# Altium PCB RNG_pcb.PcbDoc
Units mil, origin at the board's own origin, x right, y up, seen from the top; angles counter-clockwise.
Board outline 1400 x 2500 mil, 4 copper layers (Top Layer, Layer 1, Layer 2, Bottom Layer), stack 21.665 mil thick; 53 components, 35 nets, 171 pads, 39 vias.
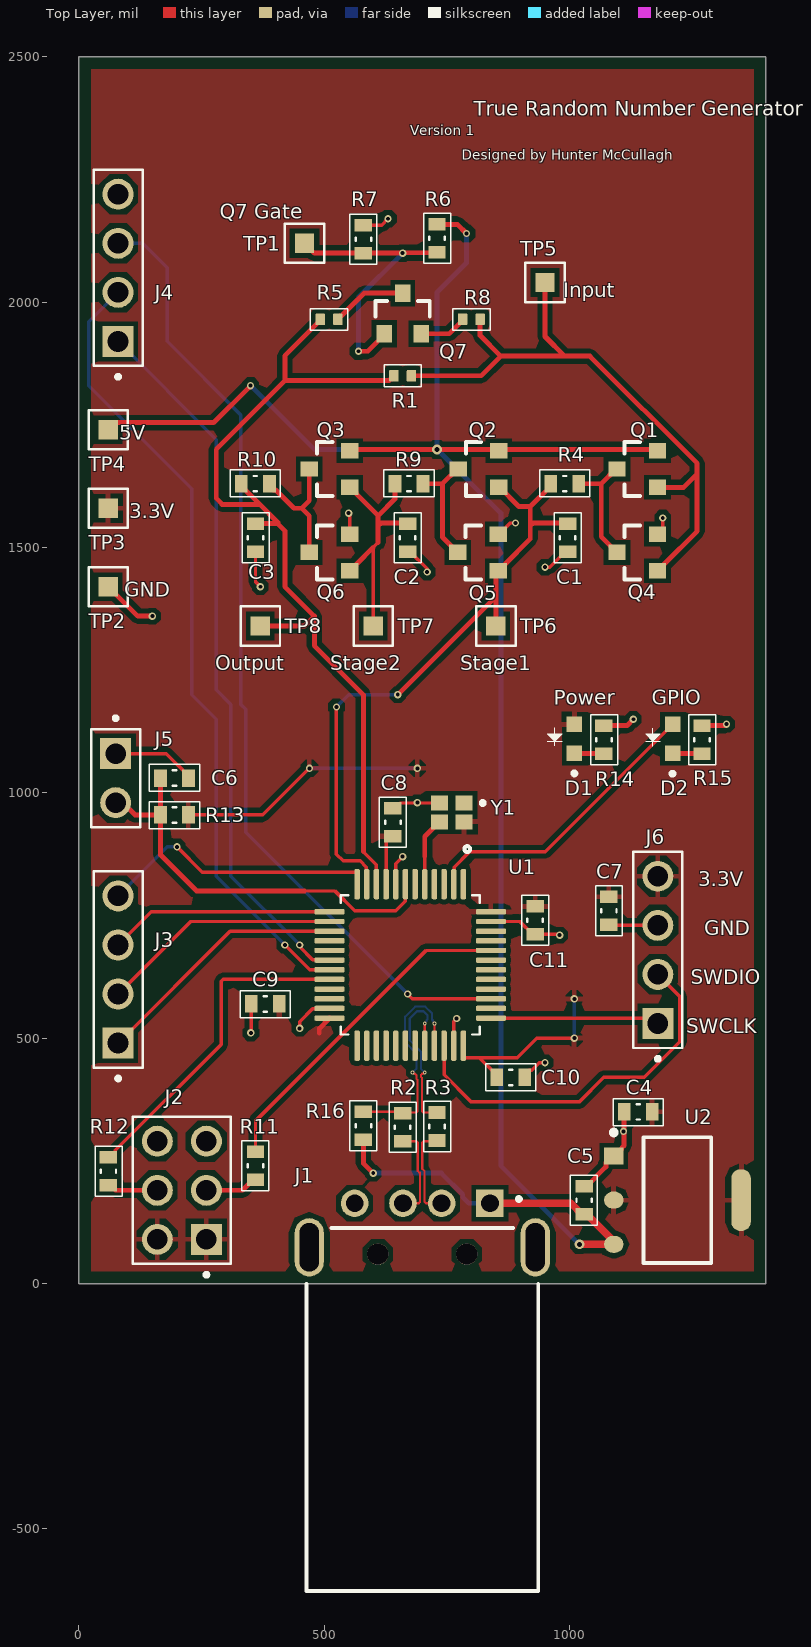
[diagram p0: Top Layer view]
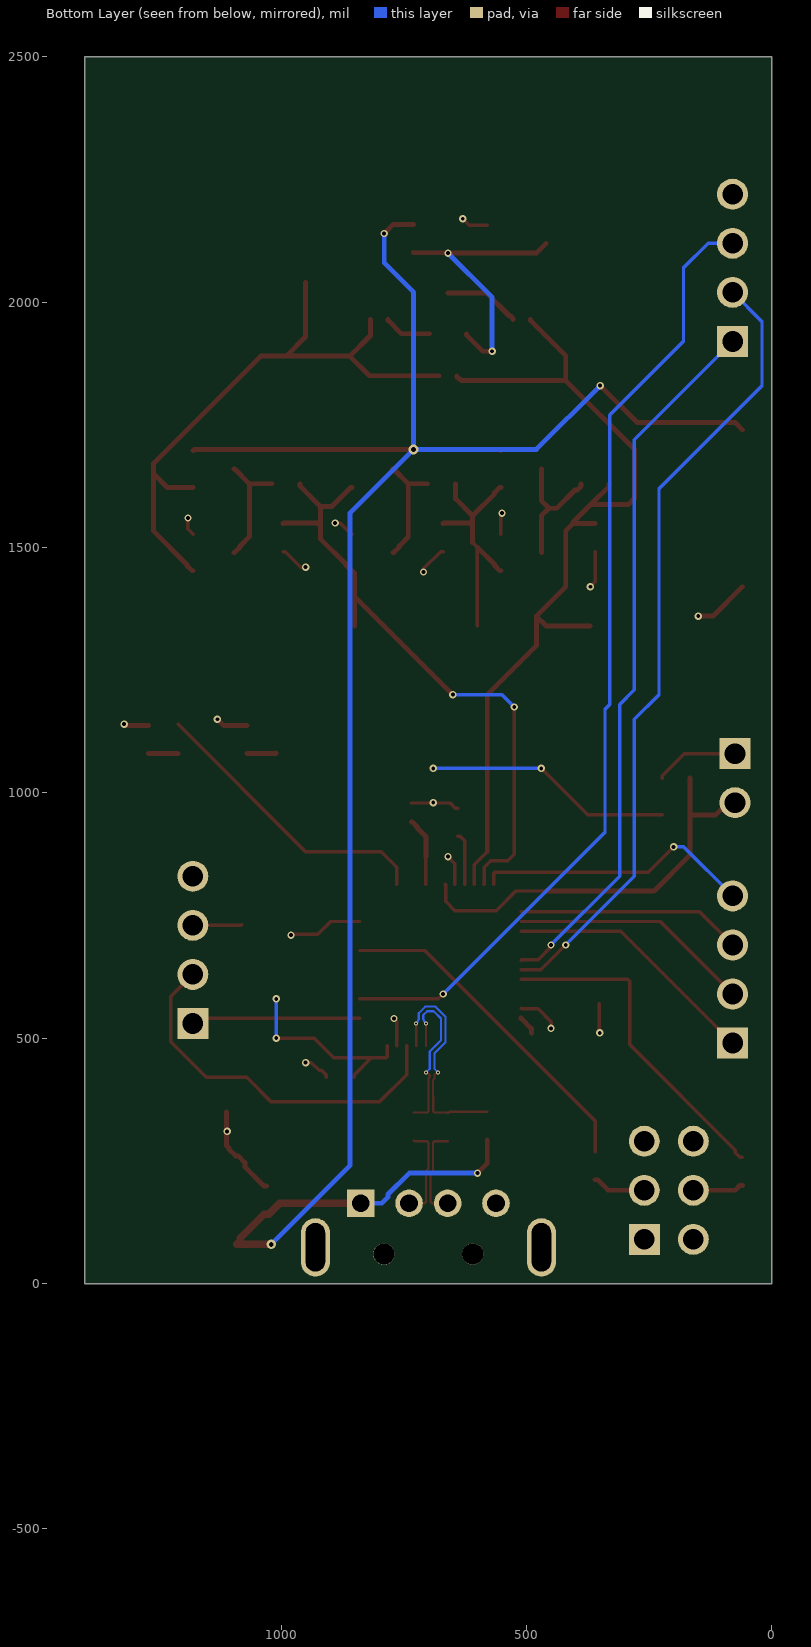
[diagram p1: Bottom Layer view, seen from below]
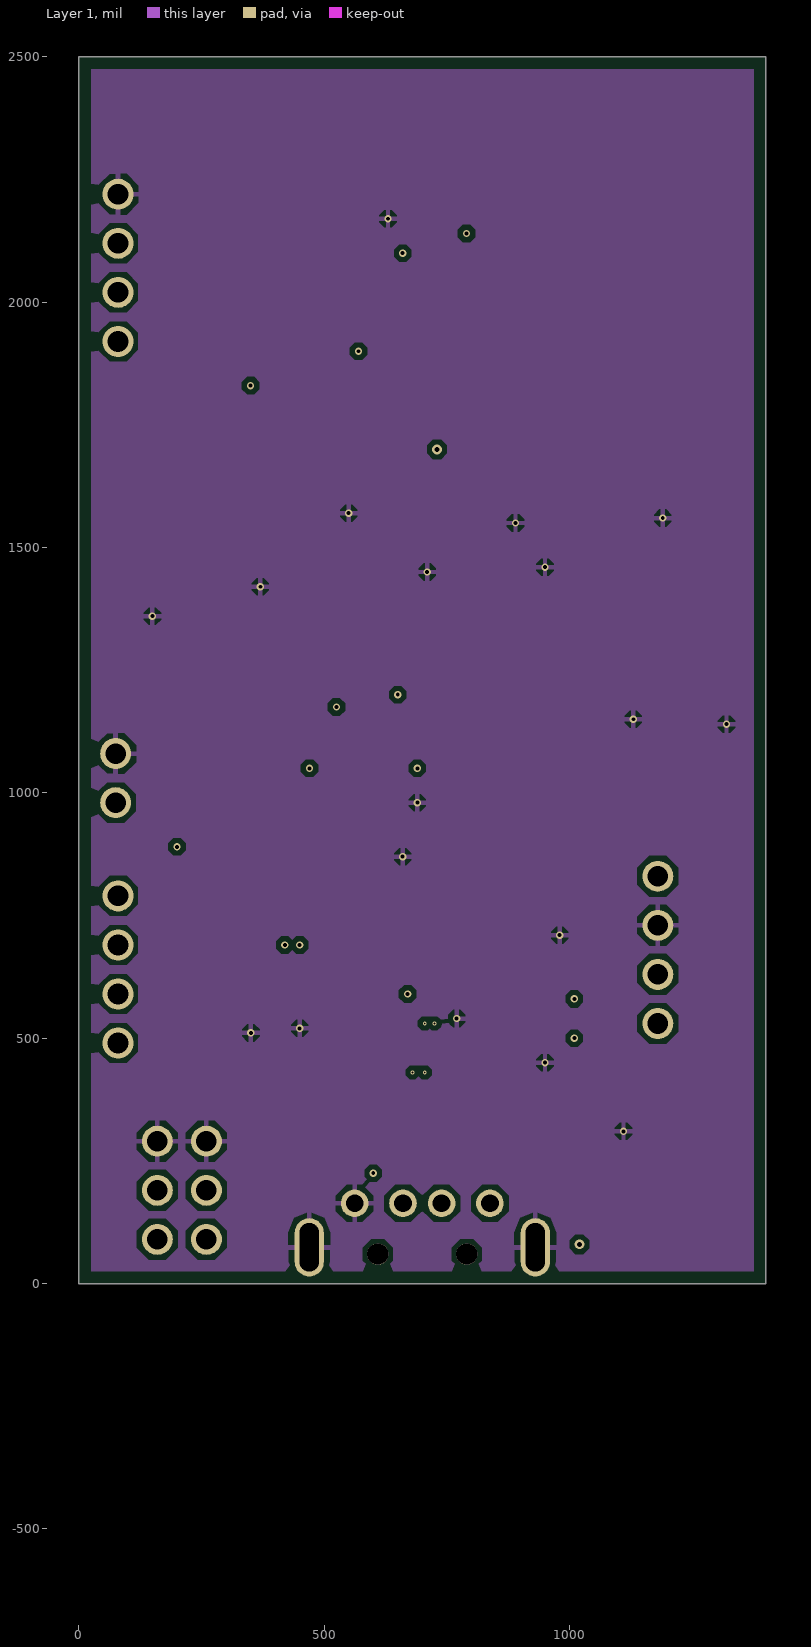
[diagram p2: Layer 1]
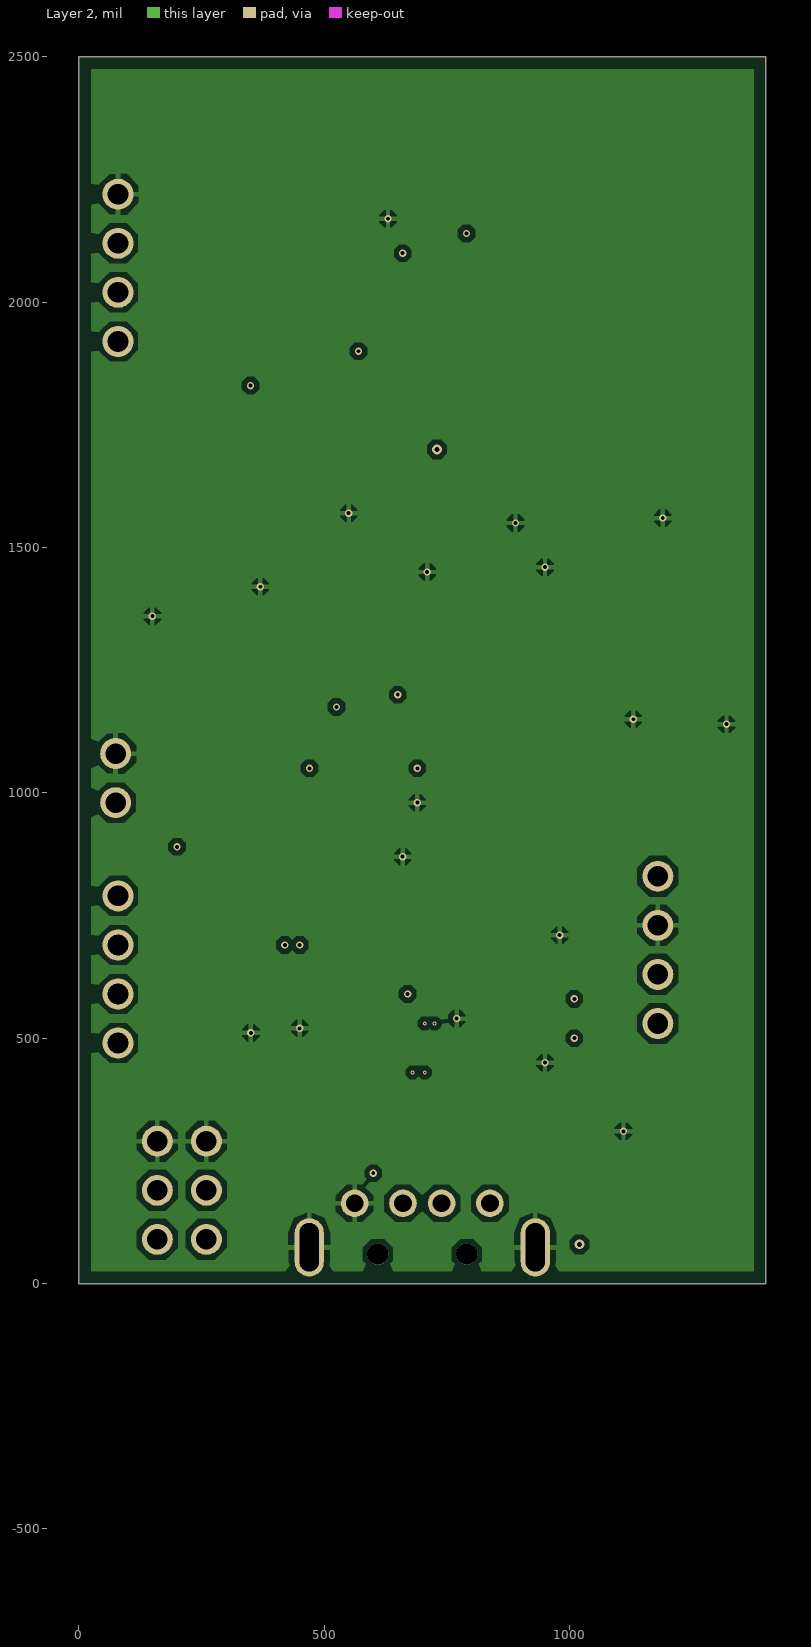
[diagram p3: Layer 2]
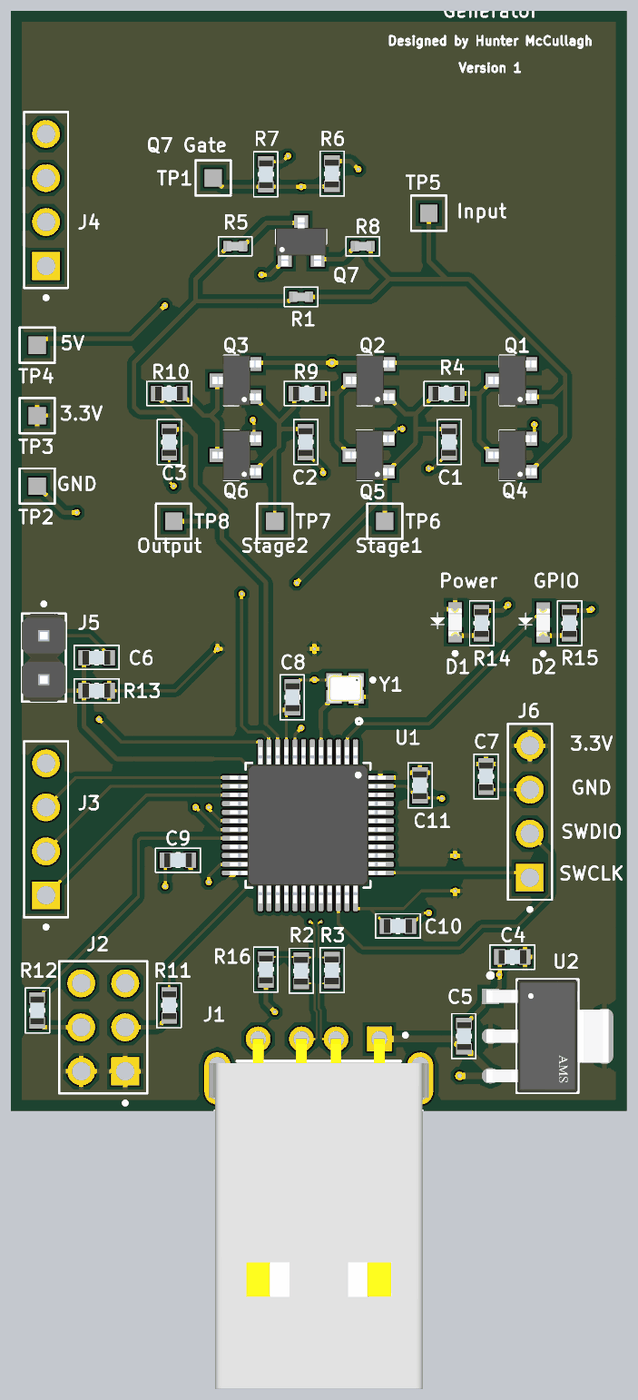
[diagram p4: 3D render of the assembled board from above, using the file's embedded part models]

## Layer stack, top to bottom
Top Solder: solder mask 0.4, Solder Resist, Dk 3.5
Top Layer: signal copper 0.3543
Dielectric 2: prepreg 2.8, PP-006, Dk 4.1
Layer 1: signal copper 1.378
Dielectric 1: dielectric 12.6, FR-4, Dk 4.8
Layer 2: signal copper 1.378
Dielectric 3: prepreg 2.8, PP-006, Dk 4.1
Bottom Layer: signal copper 0.3543
Bottom Solder: solder mask 0.4, Solder Resist, Dk 3.5

## Board outline
0,0 1400,0 1400,2500 0,2500

## Design rules (kind name [scope] priority, off if disabled: settings)
Clearance [All] p1: gap=10 ignorepadtopadclearanceinfootprint=FALSE except(0: Arc-Hole Track-Hole SMDPad-Hole THPad-Hole Via-Hole Fill-Hole Poly-Hole Region-Hole Text-Hole)
DiffPairsRouting [All] p1: maxlimit=5 minlimit=5 mostfreqgap=5 toplayer_minwidth=4.35 toplayer_maxwidth=4.35 toplayer_prefwidth=5.25 midlayer1_minwidth=2.26 midlayer1_maxwidth=2.26 midlayer1_prefwidth=2.26 midlayer2_minwidth=2.26 midlayer2_maxwidth=2.26 midlayer2_prefwidth=2.26 bottomlayer_minwidth=4.35 bottomlayer_maxwidth=4.35 bottomlayer_prefwidth=5.25 impedanceprofiledriven=TRUE impedanceprofileid={F2079DDE-E9C1-4C9C-87C4-DB1FB4918068} impedanceprofilevalue=90.000000 maxuncoupledlength=500
PolygonConnect [All] p1: connectstyle=Relief reliefconductorwidth=10 reliefentries=4 polygonreliefangle="90 Angle" airgapwidth=10
RoutingVias [All] p1: holewidth=28 width=50 viastyle="Through Hole" minholewidth=28 minwidth=50 maxholewidth=28 maxwidth=50
SolderMaskExpansion [All] p1: expansion=4 istentingtop=FALSE
Width [All] p1: maxlimit=50 minlimit=5 preferedwidth=10 minimp=50.000000 maximp=50.000000 favimp=50.000000
29 further rules are at their usual default settings.

## Classes and differential pairs
component class RNG_entropy: C1 C2 C3 Q1 Q2 Q3 Q4 Q5 Q6 Q7 R1 R4 R5 R6 R7 R8 R9 R10 TP1 TP5 TP6 TP7 TP8
component class RNG_digital: C4 C5 C6 C7 C8 C9 C10 C11 D1 D2 J1 J2 J3 J4 J5 J6 R2 R3 R11 R12 R13 R14 R15 R16 TP2 TP3 TP4 U1 U2 Y1
differential pair D_OUT: +D_OUT_P -D_OUT_N
differential pair D_IN: +D_IN_P -D_IN_N

## Components (designator, comment, footprint, x,y, rotation, side; value= is the part's Value field where it differs from the comment)
C1 "1uF 0603" "0603 PACKAGE" 996.22,1520 r90 top
C2 "1uF 0603" "0603 PACKAGE" 670,1520 r90 top
C3 "1uF 0603" "0603 PACKAGE" 360,1520 r90 top
C4 "10uF 0603" "0603 PACKAGE" 1140,350 r0 top
C5 "10uF 0603" "0603 PACKAGE" 1030,170 r270 top
C6 "1uF 0603" "0603 PACKAGE" 195,1030 r180 top
C7 "0.1uF 0603" "0603 PACKAGE" 1080,760 r90 top
C8 "0.1uF 0603" "0603 PACKAGE" 640,940 r270 top
C9 "0.1uF 0603" "0603 PACKAGE" 380,570 r0 top
C10 "0.1uF 0603" "0603 PACKAGE" 880,420 r180 top
C11 "0.1uF 0603" "0603 PACKAGE" 930,740 r90 top
D1 "LED_0603" LED_KT-0603R 1010,1110.47 r90 top
D2 "LED_0603" LED_KT-0603R 1210,1110 r90 top
J1 "USB-AM-S-X-X-TH" SAMTEC_USB-AM-S-X-X-TH 700,73.78 r0 top
J2 "2x3 Header Pin" "2X3 JUMPER" 210,190 r90 top
J3 "1x4 Header Pin" "1X4 JUMPER" 80,640 r90 top
J4 "1x4 Header Pin" "1X4 JUMPER" 80,2070 r90 top
J5 "1x2 Header Pin" "1X2 JUMPER" 75,1030 r270 top
J6 "1x4 Header Pin" "1X4 JUMPER" 1180,680 r90 top
Q1 "PMOS" SOT23-3 1140,1660 r0 top
Q2 "PMOS" SOT23-3 816.22,1660 r0 top
Q3 "PMOS" SOT23-3 512.91,1660 r0 top
Q4 "NMOS" SOT23-3 1140,1490 r0 top
Q5 "NMOS" SOT23-3 815.59,1490 r0 top
Q6 "NMOS" SOT23-3 512.91,1490 r0 top
Q7 "NMOS" SOT23-3 660,1975 r270 top
R1 "DNF" "0402 PACKAGE" 660,1850 r180 top
R2 "20Ω 0603" "0603 PACKAGE" 660,318.54 r90 top
R3 "20Ω 0603" "0603 PACKAGE" 730,320 r90 top
R4 "10kΩ 0603" "0603 PACKAGE" 990,1630 r180 top
R5 "DNF" "0402 PACKAGE" 510,1965 r180 top
R6 "DNF" "0603 PACKAGE" 730,2130 r90 top
R7 "DNF" "0603 PACKAGE" 580,2128.54 r270 top
R8 "DNF" "0402 PACKAGE" 800,1965 r180 top
R9 "10kΩ 0603" "0603 PACKAGE" 672.91,1630 r180 top
R10 "10kΩ 0603" "0603 PACKAGE" 360,1630 r180 top
R11 "100kΩ 0603" "0603 PACKAGE" 360,240 r270 top
R12 "100kΩ 0603" "0603 PACKAGE" 60,228.54 r90 top
R13 "10kΩ 0603" "0603 PACKAGE" 195,955 r0 top
R14 "60Ω 0603" "0603 PACKAGE" 1070,1108.54 r90 top
R15 "60Ω 0603" "0603 PACKAGE" 1270,1108.54 r90 top
R16 "4.7kΩ 0603" "0603 PACKAGE" 580,321.46 r270 top
TP1 "Test Point" "TEST POINT" 460,2120 r0 top
TP2 "Test Point" "TEST POINT" 60,1420 r0 top
TP3 "Test Point" "TEST POINT" 60,1580 r0 top
TP4 "Test Point" "TEST POINT" 60,1740 r0 top
TP5 "Test Point" "TEST POINT" 950,2040 r0 top
TP6 "Test Point" "TEST POINT" 850,1340 r0 top
TP7 "Test Point" "TEST POINT" 600,1340 r0 top
TP8 "Test Point" "TEST POINT" 370,1340 r0 top
U1 "STM32F103C8T6" QFP50P900X900X160-48N 675.43,649.21 r270 top
U2 "AMS1117-3.3" FP-AMS1117-IPC_C 1220,170 r0 top
Y1 "2N08000G33YC" OSC_S12505T-8.000-X-R 760,960 r180 top

## Footprints (in the part's own frame and the unit in brackets; to place one, negate y for a bottom-side part, rotate by r counter-clockwise, add the part's x,y. Pads: shape width x height; smd on the part's side, far side on the other; paste and mask are expansions set on the pad)
"1X2 JUMPER" [mm]
  rect 1.605x1.605 / inner round 1.605 / far side rect 1.605x1.605 hole 1.07: 1(-1.27,0)
  round 1.605 hole 1.07: 2(1.27,0)
  silkscreen extent -3.2,-1.27 2.54,1.27, body extent -2.54,-1.27 2.54,1.27, height 8.74
"1X4 JUMPER" [mm]
  rect 1.605x1.605 / inner round 1.605 / far side rect 1.605x1.605 hole 1.07: 1(-3.81,0)
  round 1.605 hole 1.07: 2(-1.27,0) 3(1.27,0) 4(3.81,0)
  silkscreen extent -5.74,-1.27 5.08,1.27
"2X3 JUMPER" [mm]
  rect 1.605x1.605 / inner round 1.605 / far side rect 1.605x1.605 hole 1.07: 1(-2.54,-1.27)
  round 1.605 hole 1.07: 2(-2.54,1.27) 3(0,-1.27) 4(0,1.27) 5(2.54,-1.27) 6(2.54,1.27)
  silkscreen extent -4.47,-2.54 3.81,2.54
"0402 PACKAGE" [mm]
  rrect20% 0.49x0.6 smd: 1(-0.455,0) 2(0.455,0)
  silkscreen extent -0.97,-0.56 0.97,0.56, body extent -0.5,-0.25 0.5,0.25, height 0.15
"0603 PACKAGE" [mm]
  rect 0.65x0.9 smd: 1(-0.725,0) 2(0.725,0)
  silkscreen extent -1.3,-0.71 1.3,0.69, body extent -0.8,-0.4 0.8,0.4, height 0.4
FP-AMS1117-IPC_C [mm]
  rect 1.004x0.872 smd paste+0 mask+0: 1(-3.295,2.29)
  rrect100% 1.004x0.872 smd paste+0 mask+0: 2(-3.295,0) 3(-3.295,-2.29)
  rrect87% 1.004x3.182 smd paste+0 mask+0: 4(3.295,0)
  silkscreen extent -3.42,-3.25 1.75,3.62, body extent -3.9,-3.35 3.9,3.35, height 0.25
LED_KT-0603R [mm]
  rect 0.8x0.8 smd: A(0.75,0) C(-0.75,0)
  silkscreen extent -1.9,-0.1 0.56,1.4, body extent -0.8,-0.4 0.8,0.4, height 0.65
OSC_S12505T-8.000-X-R [mm]
  rect 0.88x0.78 smd: 1(-0.64,-0.49) 2(0.64,-0.49) 3(0.64,0.49) 4(-0.64,0.49)
  silkscreen extent -1.7,-0.59 -1.5,-0.39, body extent -1,-0.8 1,0.8, height 0.8
QFP50P900X900X160-48N [mm]
  rrect50% 1.56x0.28 smd: 1(-4.18,2.75) 2(-4.18,2.25) 3(-4.18,1.75) 4(-4.18,1.25) 5(-4.18,0.75) 6(-4.18,0.25) 7(-4.18,-0.25) 8(-4.18,-0.75) 9(-4.18,-1.25) 10(-4.18,-1.75) 11(-4.18,-2.25) 12(-4.18,-2.75) 25(4.18,-2.75) 26(4.18,-2.25) 27(4.18,-1.75) 28(4.18,-1.25) 29(4.18,-0.75) 30(4.18,-0.25) 31(4.18,0.25) 32(4.18,0.75) 33(4.18,1.25) 34(4.18,1.75) 35(4.18,2.25) 36(4.18,2.75)
  rrect50% 0.28x1.56 smd: 13(-2.75,-4.18) 14(-2.25,-4.18) 15(-1.75,-4.18) 16(-1.25,-4.18) 17(-0.75,-4.18) 18(-0.25,-4.18) 19(0.25,-4.18) 20(0.75,-4.18) 21(1.25,-4.18) 22(1.75,-4.18) 23(2.25,-4.18) 24(2.75,-4.18) 37(2.75,4.18) 38(2.25,4.18) 39(1.75,4.18) 40(1.25,4.18) 41(0.75,4.18) 42(0.25,4.18) 43(-0.25,4.18) 44(-0.75,4.18) 45(-1.25,4.18) 46(-1.75,4.18) 47(-2.25,4.18) 48(-2.75,4.18)
  silkscreen extent -6.15,-3.6 3.6,3.6, body extent -4.5,-4.5 4.5,4.5, height 1.6
SAMTEC_USB-AM-S-X-X-TH [mm]
  rect 1.428x1.428 / inner round 1.428 / far side rect 1.428x1.428 hole 0.92: 01(3.5,2.28)
  round 1.428 hole 0.92: 02(1,2.28) 03(-1,2.28) 04(-3.5,2.28)
  oval 1.508x3.016 hole 1 slot 2.5 at 90 deg: S1(-5.85,0) S2(5.85,0)
  round 1.1 hole 1.1 unplated: ""(-2.3,-0.35) ""(2.3,-0.35)
  silkscreen extent -6,-17.8 6,2.6, body extent -6.35,-17.91 6.35,2.29, height 4.5
SOT23-3 [mm]
  rect 0.9x0.8 smd: 1(1,-0.95) 2(1,0.95) 3(-1.1,0)
  silkscreen extent -0.7,-1.4 0.1,1.4, body extent -1.4,-1.45 1.4,1.45, height 1.25
"TEST POINT" [mm]
  rect 1x1 smd: 1(0,0)
  silkscreen extent -1.02,-1.02 1.02,1.02

## Part data
C1 C2 C3 C4 C5 C6 C7 C8 C9 C10 C11: library part 0603_Capacitor, Package="1608 Murata", Check_prices=https://www.snapeda.com/parts/GCJ188R71E104KA12D/Murata/view-part/?ref=eda, MF=Murata, MP=GCJ188R71E104KA12D, SnapEDA_Link=https://www.snapeda.com/parts/GCJ188R71E104KA12D/Murata/view-part/?ref=snap
D1 D2: "Red 0603 Light Emitting Diodes", Package=Package, Check_prices=https://www.snapeda.com/parts/KT-0603R/Hubei+KENTO+Elec/view-part/?ref=eda, MF="Hubei KENTO Elec", MP=KT-0603R, SnapEDA_Link=https://www.snapeda.com/parts/KT-0603R/Hubei+KENTO+Elec/view-part/?ref=snap
J1: "USB Connectors USB 2.0 Interface, Type A", Package=None, Availability="In Stock", Check_prices=https://www.snapeda.com/parts/USB-AM-S-S-W-TH/Samtec/view-part/?ref=eda, MF=Samtec, MP=USB-AM-S-S-W-TH, Price=None, Purchase-URL=https://pricing.snapeda.com/search/part/USB-AM-S-S-W-TH/?ref=eda, SnapEDA_Link=https://www.snapeda.com/parts/USB-AM-S-S-W-TH/Samtec/view-part/?ref=snap
J2: Package=None, Availability=Unavailable, MP=M20-9980346, Price=None
J3 J4 J6: "2.54mm (0.1) Pitch SIL Vertical Throughboard Pin Header, 7mm mating pin height, tin, 4 contacts", Package=None, Check_prices=https://www.snapeda.com/parts/M20-9730446/Harwin/view-part/?ref=eda, MF=Harwin, MP=M20-9730446, SnapEDA_Link=https://www.snapeda.com/parts/M20-9730446/Harwin/view-part/?ref=snap
J5: "2.54mm (0.1) Pitch SIL Vertical Throughboard Pin Header, 6.1mm mating pin height, tin, 2 contacts", Package=None, Check_prices=https://www.snapeda.com/parts/M20-9990246/Harwin/view-part/?ref=eda, MF=Harwin, MP=M20-9990246, SnapEDA_Link=https://www.snapeda.com/parts/M20-9990246/Harwin/view-part/?ref=snap
Q1 Q2 Q3: library part AO3401A, "P-Channel 30 V 4A (Ta) 1.4W (Ta) Surface Mount SOT-23-3", Package="SOT-23 Alpha &amp; Omega Semiconductor", Check_prices=https://www.snapeda.com/parts/AO3401A/Alpha/view-part/?ref=eda, MF="Alpha & Omega Semiconductor", MP=AO3401A, SnapEDA_Link=https://www.snapeda.com/parts/AO3401A/Alpha/view-part/?ref=snap
Q4 Q5 Q6 Q7: library part AO3400A, "N-Channel 30 V 5.7A (Ta) 1.4W (Ta) Surface Mount SOT-23-3", Package="SOT-23 Alpha &amp; Omega Semiconductor Inc.", Check_prices=https://www.snapeda.com/parts/AO3400A/Alpha/view-part/?ref=eda, MF="Alpha & Omega Semiconductor", MP=AO3400A, SnapEDA_Link=https://www.snapeda.com/parts/AO3400A/Alpha/view-part/?ref=snap
R1 R5 R8: library part 0402_Resistor, Package="1005 Yageo", Check_prices=https://www.snapeda.com/parts/CRGCQ0402F10R/TE+Connectivity/view-part/?ref=eda, MF="TE Connectivity", MP=CRGCQ0402F10R, SnapEDA_Link=https://www.snapeda.com/parts/CRGCQ0402F10R/TE+Connectivity/view-part/?ref=snap
R2 R3 R4 R6 R7 R9 R10 R11 R12 R13 R14 R15 R16: library part 0603_Resistor, Package="1608 Rohm Semiconductor", Check_prices=https://www.snapeda.com/parts/CRGCQ0603F120R/TE+Connectivity/view-part/?ref=eda, MF="TE Connectivity", MP=CRGCQ0603F120R, SnapEDA_Link=https://www.snapeda.com/parts/CRGCQ0603F120R/TE+Connectivity/view-part/?ref=snap
U1: "ARM® Cortex®-M3 STM32F1 Microcontroller IC 32-Bit 72MHz 64KB (64K x 8) FLASH 48-LQFP (7x7)", Package="LQFP-48 STMicroelectronics", Check_prices=https://www.snapeda.com/parts/STM32F103C8T6/STMicroelectronics/view-part/?ref=eda, MF=STMicroelectronics, MP=STM32F103C8T6, SnapEDA_Link=https://www.snapeda.com/parts/STM32F103C8T6/STMicroelectronics/view-part/?ref=snap
U2: library part CMP-209535-000001-1, "LDO Voltage Regulators 1A, 3.3V", Dropout Voltage=1.1V, Manufacturer="Advanced Monolithic Systems", Max Junction Temp=+125°C, Max Power Dissipation=1.2W, Max Supply Voltage=15V, Nominal Supply Current=5mA, Output Current=1A, Output Voltage=3.3V, Package=AMS1117, Temperature="-40°C to +125°C", Temperature Range Low=-40°C, Automotive=No, Category=IC, ComponentLink2Description=Datasheet, ComponentLink2URL=http://www.advanced-monolithic.com/pdf/ds1117.pdf, Device Class L1="Integrated Circuits (ICs)", Device Class L2="Power Management ICs", Device Class L3="Voltage Regulators - Linear", Height=1.8mm, Ipc Land Pattern Name=SOT229P700X180-4, Lead Free=Yes, Manufacturer Part Number=AMS1117-3.3, Number Of Outputs=1, Octopart=https://octopart.com/ams1117-3.3-advanced+monolithic+systems-25899300, Output Type=Fixed, RoHS=TRUE, Standoff Height=0.64mm, Temperature Range High=+125°C
Y1: library part CrystalOscillator_SMD2520-4P, Package=None, Availability=Unavailable, MP=S12505T-8.000-X-R, Price=None

## Via types
v1: diameter 15, hole 8, Top Layer to Bottom Layer, 33 vias
v2: diameter 8, hole 4, Top Layer to Bottom Layer, 4 vias
v3: diameter 20, hole 10, Top Layer to Bottom Layer, 2 vias

## Nets (pads, with @x,y where several pads share a name; then routed paths per layer and width w, separated by ;. In a path a pad name is that pad's centre, name@x,y a point inside that pad or via, vN(x,y) a via of type N, cw(c..) or ccw(c..) an arc to the next point about the centre after c; other vN are vias at no path point)
+3v3: C4.2 C7.2 C8.2 C9.2 C10.2 C11.2 D1.A J2.1 J2.2 J6.4 R13.2 TP3.1 U1.9 U1.24 U1.36 U1.48 U2.2 U2.4 Y1.4 | length 1052.3
  Top Layer w7: R13.2 375,955 v1(470,1050) ; U1.9 626.22,902.16 635.52,911.46 C8.2 ; U1.36 783.7,462.2 785.71,460.19 816.19,460.19 ; C10.2 851.46,424.92 816.19,460.19 ; v1(1010,500) 933,500 893.19,460.19 816.19,460.19
  Top Layer w10: 490,510 490,519.57 510.87,540.43 U1.24
  Bottom Layer w7: v1(470,1050) v1(690,1050) ; v1(1010,500) v1(1010,580)
+5: C5.2 J1.01 Q1.2 Q2.2 Q3.2 R6.2 R16.2 TP4.1 U2.3 | length 4367.2
  Top Layer w10: TP4.1 74.69,1754.69 274.69,1754.69 v1(350,1830) ; Q3.2 554.88,1700 v3(730,1700) 1176.77,1700 Q1.2 ; R16.2 580,245 v1(600,225) ; R6.2 771.46,2158.54 v1(790,2140)
  Top Layer w15: J1.01 1002.99,163.54 1025.08,141.46 C5.2 1034.92,141.46 1083.97,92.4 1083.97,86.14 U2.3 v3(1020.16,79.84) v3@1020,80
  Bottom Layer w10: v1(350,1830) 480,1700 v3(730,1700) ; v1(600,225) 738.88,225 782.48,181.4 782.48,175.75 794.68,163.54 J1.01 ; v1(790,2140) 790,2080 730,2020 v3(730,1700) ; v3(1020.16,79.84) 860,240 860,1570 v3(730,1700)
BOOT0: R11.1 U1.44 | length 686.6
  Top Layer w7: R11.1 360,331.18 707.56,678.74 U1.44
BOOT1: R12.2 U1.20 | length 679.7
  Top Layer w7: R12.2 64.92,257.09 74.22,266.38 74.22,271.3 290,487.09 290,615.9 294.1,620 510.55,620 U1.20
D_IN_N: J1.02 R3.1 | length 190.7
  Top Layer w4.35: R3.1 728.54,290 702.52,290 699.98,287.45 699.98,233.79 704.67,229.1 704.67,166.09 707.22,163.54 J1.02
D_IN_P: J1.03 R2.1 | length 190.7
  Top Layer w4.35: R2.1 688.08,290 690.63,287.45 690.63,229.92 695.33,225.22 695.33,166.09 692.78,163.54 J1.03
D_OUT_N: R3.2 U1.32 | length 349.5
  Top Layer w4.35: v2(705,430) 704.01,430 701.53,427.52 699.72,427.52 697.17,424.97 697.17,421.37 699.67,418.87 699.67,377.25 699.37,376.95 699.37,351.09 701.92,348.54 R3.2 ; U1.32@704.98,484.67 v2(705,530)
  Bottom Layer w4.35: v2(705,430) 697.17,437.83 697.17,472.79 674.35,495.61 674.35,540 689.35,555 702.45,555 710.33,547.13 710.33,538.2 708.83,536.7 708.83,534.81 705,530.99 v2(705,530)
D_OUT_P: R2.2 R16.1 U1.33 | length 461.8
  Top Layer w4.35: R16.1 657.09,350 R2.2 661.46,348.54 687.48,348.54 690.02,351.09 690.02,380.82 690.33,381.12 690.33,415 687.83,417.5 687.83,424.97 685.28,427.52 683.47,427.52 680.99,430 v2(680,430) ; U1.33 724.82,484.82 724.82,529.82 v2(725,530)
  Bottom Layer w4.35: v2(680,430) 687.83,437.83 687.83,468.91 665,491.74 665,543.87 685.48,564.35 706.33,564.35 719.67,551 719.67,538.2 721.17,536.7 721.17,534.81 725,530.99 v2(725,530)
GND: C1.1 C2.1 C3.1 C4.1 C5.1 C6.1 C7.1 C8.1 C9.1 C10.1 C11.1 J1.04 J1.S1 J1.S2 J2.5 J2.6 J4.4 J5.1 J6.3 Q4.2 Q5.2 Q6.2 R7.1 R14.2 R15.2 TP2.1 U1.8 U1.23 U1.35 U1.47 U2.1 Y1.2 | length 1645.1
  Top Layer w7: J5.1 178.46,1080 223.54,1034.92 C6.1 ; v1@350,510 v1(350.73,510.73) 351.46,511.46 C9.1 ; C3.1 360,1430 v1(370,1420) ; v1(450,520) 450,533.78 476.18,559.96 510.19,559.96 U1.23 ; v1(550,1570) 552.28,1567.72 Q6.2 ; R7.1 617.09,2157.09 v1(630,2170) ; C8.1 644.92,968.54 655.67,979.29 Y1.2 ; U1.8 645.91,855.91 v1(660,870) ; C2.1 674.92,1491.46 710,1456.38 v1(710,1450) ; U1.35 764.02,534.02 v1(770,540) ; U1.47 898.74,737.8 925.08,711.46 C11.1 978.54,711.46 v1(980,710) ; Q5.2 856.93,1527.4 879.53,1550 v1(890,1550) ; C10.1 908.54,424.92 917.84,434.22 922.76,434.22 938.54,450 v1(950,450) ; v1(950,1460) 959.84,1460 991.3,1491.46 C1.1 ; C7.1 1081.46,730 J6.3 ; Q4.2 1190,1538.03 v1(1190,1560) ; v1@1317.09,1137.09 v1(1320,1140)
  Top Layer w10: TP2.1 120,1360 v1(150,1360) ; C5.1 1034.92,198.54 1074.01,237.63 1074.01,246.49 1087.67,260.16 U2.1 1092.88,260.16 1106.55,273.83 1106.55,276.43 1111.46,281.34 C4.1 ; R14.2 1117.09,1137.09 v1(1130,1150) ; R15.2 v1@1317.09,1137.09
  other v1: 1110,310 690,980
LED1: D2.A U1.2 | length 600.8
  Top Layer w7: U1.2 764.69,814.45 764.69,848.47 796.22,880 950.47,880 D2.A
NetD1_C: D1.C R14.1 | length 60.4
  Top Layer w10: D1.C 1010.94,1080 R14.1
NetD2_C: D2.C R15.1 | length 60.2
  Top Layer w10: D2.C 1210.47,1080 R15.1
NetJ2_3: J2.3 R11.2 | length 108.9
  Top Layer w10: J2.3 333.62,190 355.08,211.46 R11.2
NetJ2_4: J2.4 R12.1 | length 104.1
  Top Layer w10: R12.1 64.92,200 74.92,190 J2.4
NetQ1_3: Q1.3 Q4.3 R4.1 | length 245
  Top Layer w10: R4.1 1064.72,1630 ; Q4.3 1094.72,1490 1083.98,1500.75 1083.98,1502.72 1064.72,1521.97 1064.72,1630 ; Q1.3 1094.72,1660 1064.72,1630
NetQ2_3: Q2.3 Q5.3 R9.1 | length 238
  Top Layer w10: R9.1 740.94,1630 ; Q5.3 770.32,1490 759.57,1500.75 759.57,1502.72 740.94,1521.34 740.94,1630 ; Q2.3 770.94,1660 740.94,1630
NetQ3_3: Q3.3 Q6.3 R10.1 | length 272
  Top Layer w10: R10.1 388.54,1625.08 396.34,1617.28 401.26,1617.28 438.54,1580 454.14,1580 ; Q6.3 469.61,1564.54 454.14,1580 ; Q3.3 469.61,1595.46 454.14,1580
NetQ7_1: Q7.1 R6.1 R7.2 TP1.1 | length 584.7
  Top Layer w10: TP1.1 480,2100 R7.2 v1(660,2100) 660.73,2100.73 729.27,2100.73 R6.1 ; v1(570,1900) 588.94,1900 622.6,1933.66 Q7.1
  Bottom Layer w10: v1(570,1900) 570,2010 v1(660,2100)
NetQ7_2: Q7.2 R8.2 | length 98.1
  Top Layer w10: Q7.2 754.88,1935.63 782.09,1962.83 R8.2
NetQ7_3: Q7.3 R5.1 | length 155.4
  Top Layer w10: R5.1 527.91,1967.17 532.56,1971.81 534.72,1971.81 581.22,2018.31 Q7.3
OSC_IN: U1.5 Y1.3 | length 140.4
  Top Layer w7: U1.5 U1.5 705,870
  Top Layer w10: 705,870 705,910.91 722.48,928.39 722.48,930.35 732.83,940.71 Y1.3
PA2: J3.4 U1.12 | length 573.3
  Top Layer w7: v1(200,890) 251.77,838.23 565.15,838.23 567.17,836.22 U1.12
  Bottom Layer w7: J3.4 180,890 v1(200,890)
PA3: J3.3 U1.13 | length 458.8
  Top Layer w7: J3.3 147.48,757.48 U1.13
PA4: J3.2 U1.14 | length 492.1
  Top Layer w7: J3.2 227.8,737.8 U1.14
PA5: J3.1 U1.15 | length 525.4
  Top Layer w7: J3.1 308.11,718.11 U1.15
PB0: J4.1 U1.18 | length 1459.3
  Top Layer w7: v1(450,690) 450,685.91 476.18,659.73 510.19,659.73 U1.18
  Bottom Layer w7: J4.1 280,1720 280,1210 310,1180 310,830 v1(450,690)
PB1: J4.2 U1.19 | length 1632.4
  Top Layer w7: v1(420,690) 470.63,639.37 U1.19
  Bottom Layer w7: J4.2 20,1960 20,1830 230,1620 230,1200 280,1150 280,830 v1(420,690)
PB3: J4.3 U1.39 | length 1977.7
  Top Layer w7: v1(670,590) 679.68,580.32 U1.39
  Bottom Layer w7: J4.3 130,2120 180,2070 180,1920 330,1770 330,1180 340,1170 340,920 v1(670,590)
RESET: C6.2 J5.2 R13.1 U1.7 | length 846.6
  Top Layer w7: 460,800 522.04,800 562.04,760 645.82,760 664.92,779.09 664.92,813.11 U1.7
  Top Layer w10: J5.2 89.39,980 114.39,955 R13.1 ; C6.2 R13.1 ; 460,800 240,800 166.46,873.54 R13.1
ring_osc_input: Q1.1 Q4.1 R1.1 R8.1 TP5.1 | length 1293.6
  Top Layer w10: R1.1 820,1850 860,1890 ; R8.1 817.91,1932.09 860,1890 ; TP5.1 950,1930 990,1890 ; Q4.1 1181.34,1452.6 1192.09,1463.35 1192.09,1465.32 1260,1533.23 1260,1650 ; Q1.1 1232.6,1622.6 1260,1650 ; 860,1890 990,1890 ; 990,1890 1041.45,1890 1260,1671.45 1260,1650
ring_osc_output: C3.2 R1.2 R5.2 R10.2 TP8.1 U1.10 | length 1867.9
  Top Layer w7: 580,880 606.54,853.46 U1.10
  Top Layer w10: R10.2 331.46,1625.08 368.53,1588.01 ; C3.2 405.6,1548.54 ; TP8.1 460,1340 480,1360 ; R5.2 492.09,1962.83 420,1890.75 420,1840 ; 580,880 580,1200 480,1300 480,1360 ; R1.2 642.09,1847.83 637.44,1843.19 635.28,1843.19 632.09,1840 420,1840 ; 368.53,1588.01 405.6,1550.94 405.6,1548.54 ; 368.53,1588.01 291.99,1588.01 280,1600 280,1700 420,1840 ; 405.6,1548.54 420,1534.14 420,1420 480,1360
ring_osc_stage1: C1.2 Q2.1 Q5.1 R4.2 TP6.1 U1.11 | length 1322.5
  Top Layer w7: v1(525,1175) 525,875 538.5,861.5 573.14,861.5 586.18,848.47 586.18,814.45 U1.11
  Top Layer w10: v1(650,1200) 850,1400 ; TP6.1 850,1400 ; Q2.1 857.56,1622.6 896.54,1583.62 920,1583.62 ; R4.2 961.46,1625.08 920,1583.62 ; C1.2 994.76,1550 925.86,1550 920,1544.14 ; 850,1400 850,1447.64 Q5.1 856.93,1452.6 867.68,1463.35 867.68,1465.32 920,1517.64 920,1544.14 ; 920,1544.14 920,1583.62
  Bottom Layer w7: v1(525,1175) 550,1200 v1(650,1200)
ring_osc_stage2: C2.2 Q3.1 Q6.1 R9.2 TP7.1 | length 522.8
  Top Layer w7: TP7.1 600,1500.31 610,1510.31
  Top Layer w10: Q6.1 554.25,1452.6 565,1463.35 565,1465.32 600,1500.31 ; Q3.1 554.25,1622.6 565,1611.85 565,1609.88 610,1564.88 ; 610,1510.31 610,1544.14 ; R9.2 644.37,1599.25 610,1564.88 ; C2.2 668.54,1550 615.86,1550 610,1544.14 ; 610,1544.14 610,1564.88
SWCLK: J6.1 U1.37 | length 344.5
  Top Layer w7: U1.37 1169.06,540.94 J6.1
SWDIO: J6.2 U1.34 | length 769.5
  Top Layer w7: U1.34 744.33,425.67 800,370 1020,370 1070,420 1152.28,420 1225.09,492.81 1225.09,584.91 J6.2
pads on no net: J1. U1.1 U1.3 U1.4 U1.6 U1.16 U1.17 U1.21 U1.22 U1.25 U1.26 U1.27 U1.28 U1.29 U1.30 U1.31 U1.38 U1.40 U1.41 U1.42 U1.43 U1.45 U1.46 Y1.1

## Polygon pours and split planes (outlines as drawn)
GND on Layer 1 "GND_L02_P001" (solid, pour order 1): 25,2475 1375,2475 1375,25 25,25
GND on Layer 2 "GND_L03_P002" (solid, pour order 2): 25,2475 1375,2475 1375,25 25,25
+3v3 on Top Layer "+3V3_L01_P000" (solid, pour order 0): 25,2475 1375,2475 1375,25 25,25

## Silkscreen, mask and mechanical layers (free items; w line width, h text height)
Top Overlay:
  text "True Random Number Generator" at 805.02,2380 h30
  text "Version 1" at 675.13,2340 h20
  text "Designed by Hunter McCullagh" at 780.85,2290 h20
  text "Q7 Gate" at 287.54,2170 h30
  text "Input" at 987.53,2010 h30
  text "5V" at 82.52,1720 h30
  text "3.3V" at 102.52,1560 h30
  text "GND" at 92.52,1400 h30
  text "Output" at 277.53,1250 h30
  text "Stage2" at 512.53,1250 h30
  text "Stage1" at 777.53,1250 h30
  text "Power" at 967.52,1180 h30
  text "GPIO" at 1167.52,1180 h30
  text "3.3V" at 1262.52,810 h30
  text "GND" at 1275.01,710 h30
  text "SWDIO" at 1247.52,610 h30
  text "SWCLK" at 1237.53,510 h30
Board Outline:
  the board outline again, w3